# Altium PCB PCB10.PcbDoc
Units mm, origin at the board's own origin, x right, y up, seen from the top; angles counter-clockwise.
Board outline 100 x 100 mm, 12 copper layers (L1, L2, L3, L4, L5, L6, L7, L8, L9, L10, L11, L12), stack 71.138 mm thick; 2 components, 6 nets, 4 pads, 140 vias.
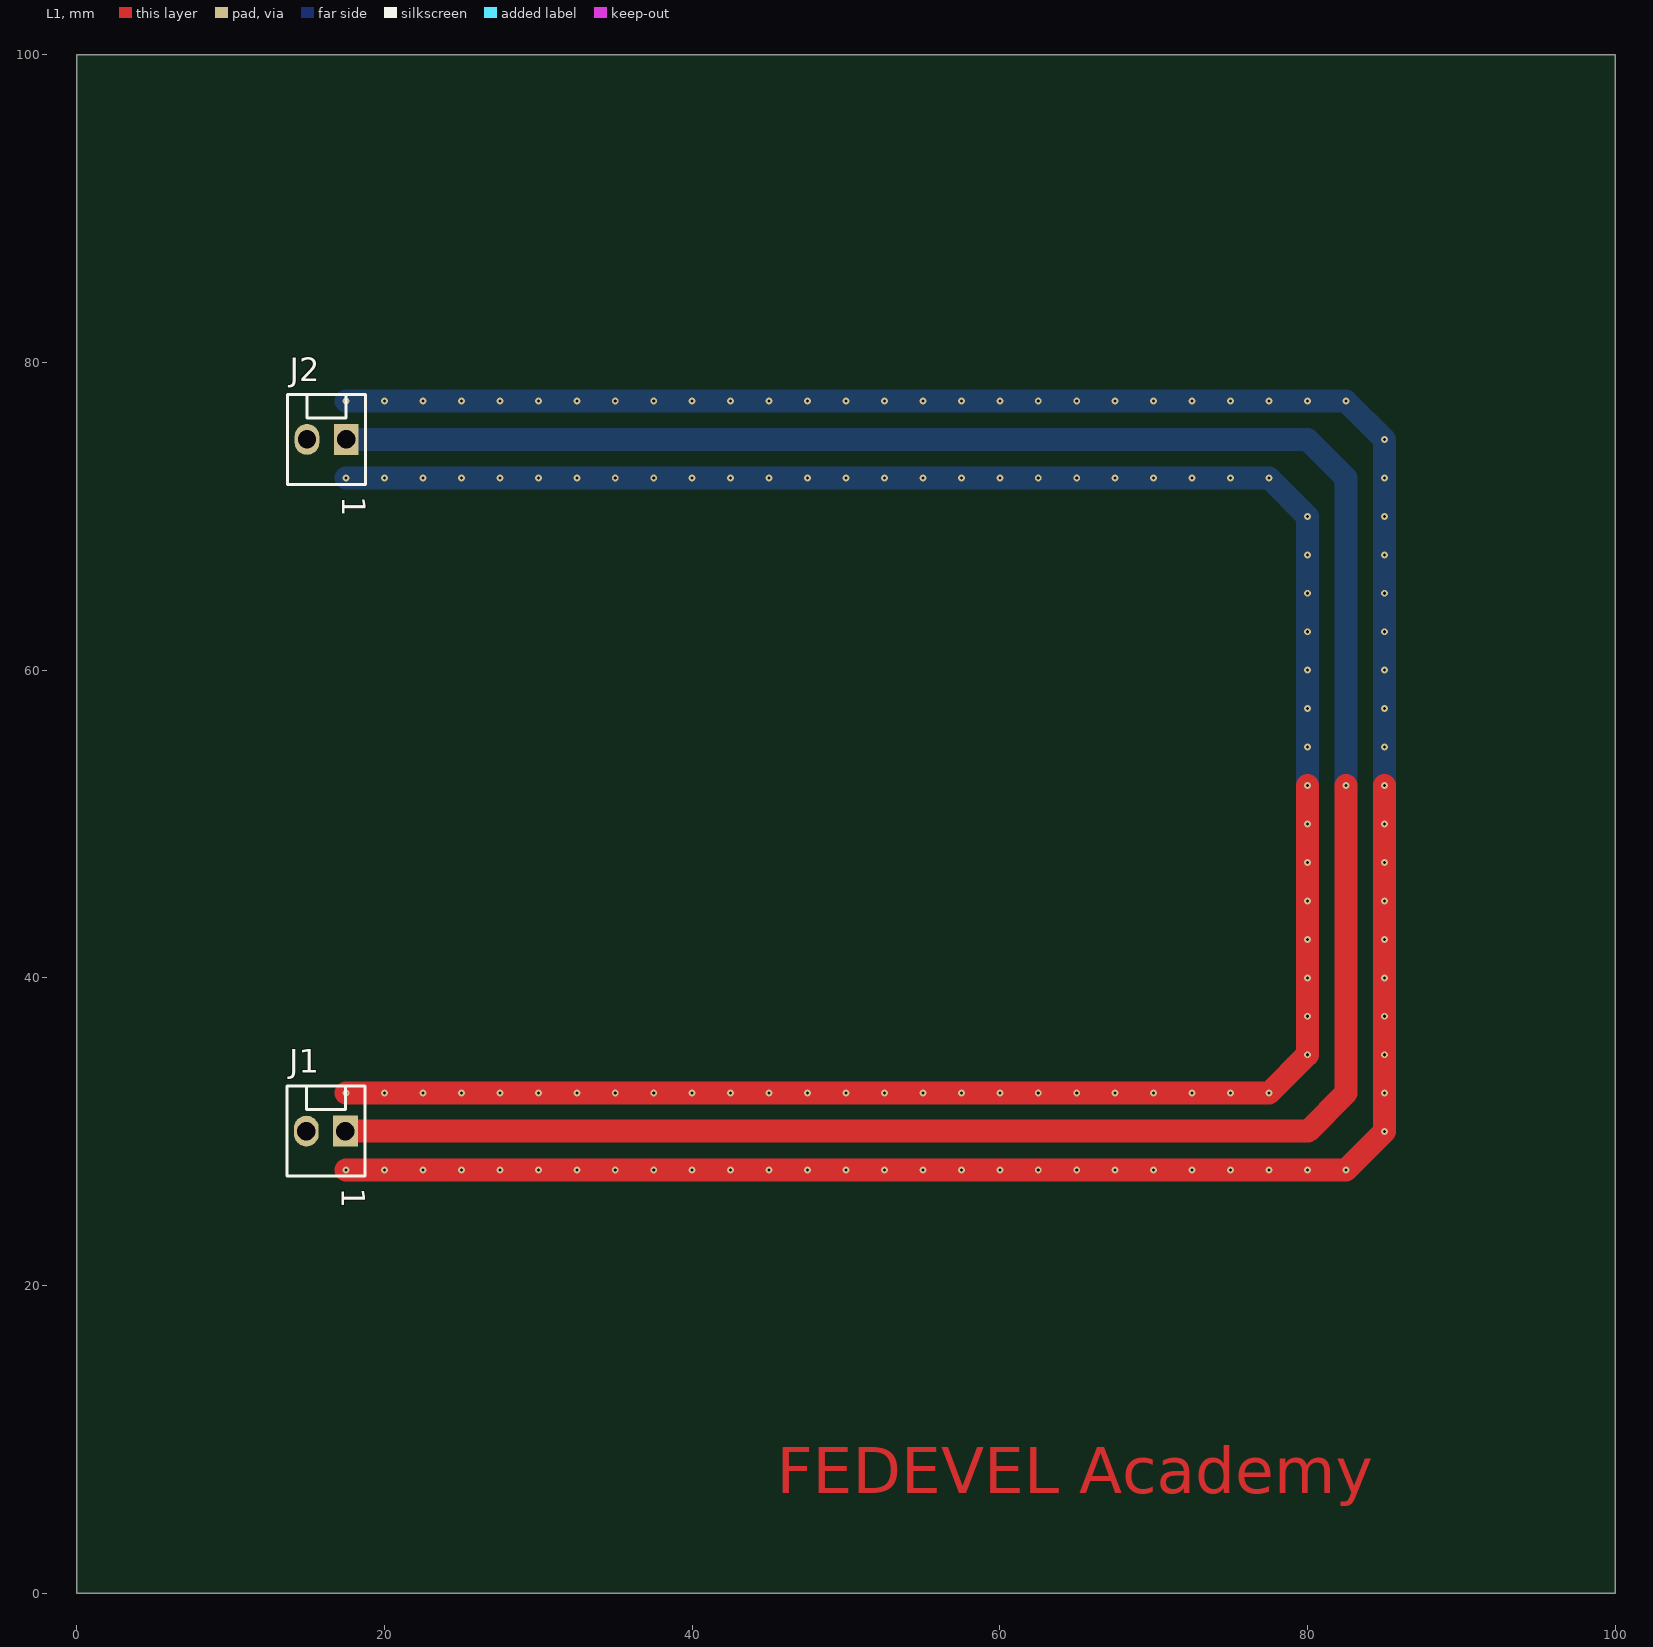
[diagram p0: L1 view]
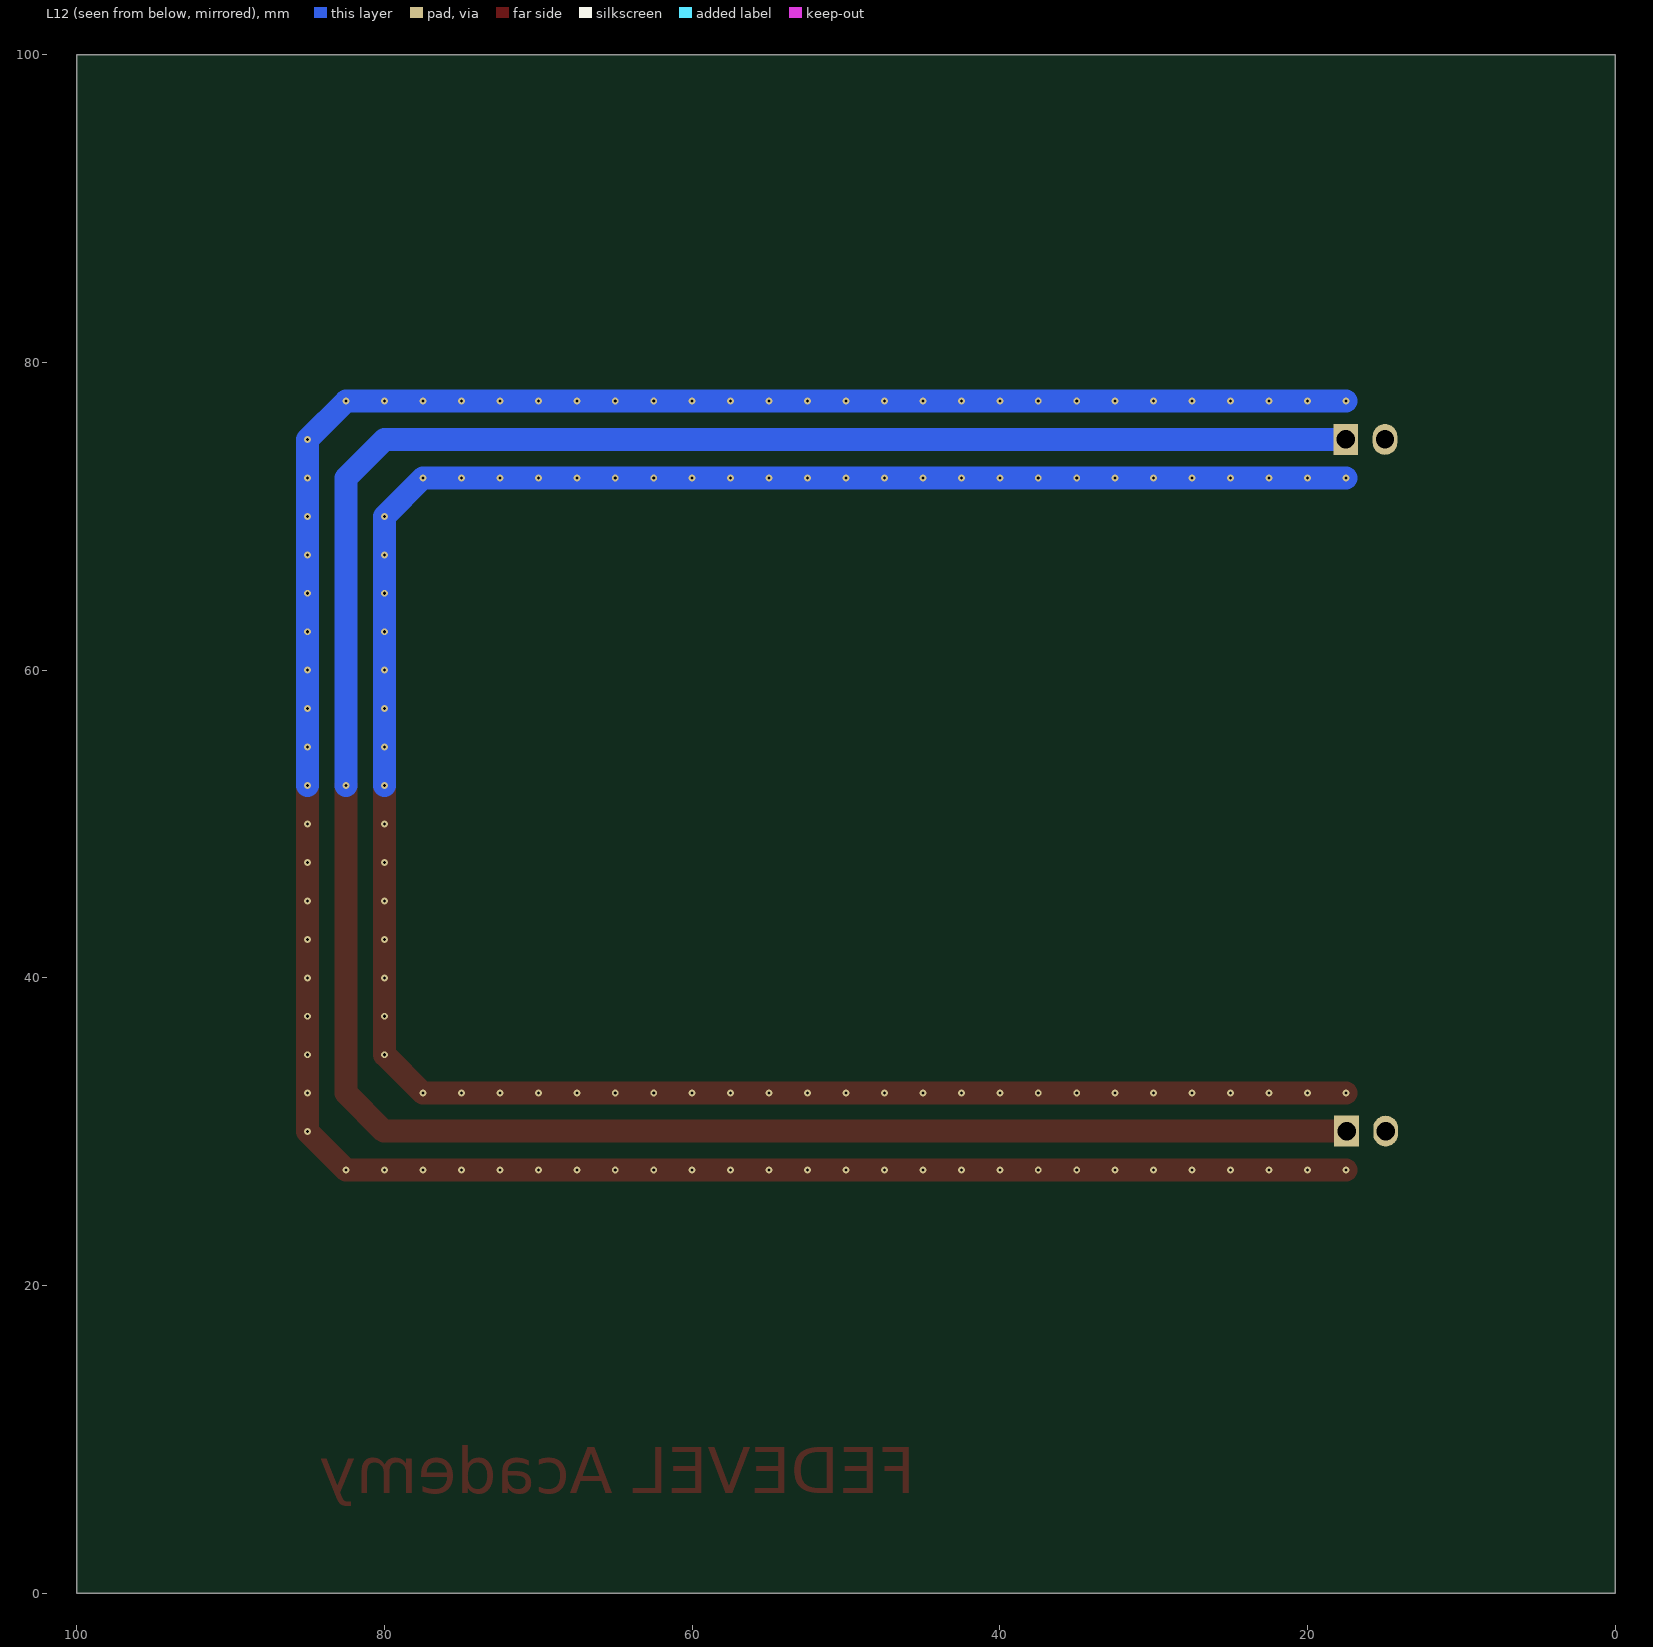
[diagram p1: L12 view, seen from below]
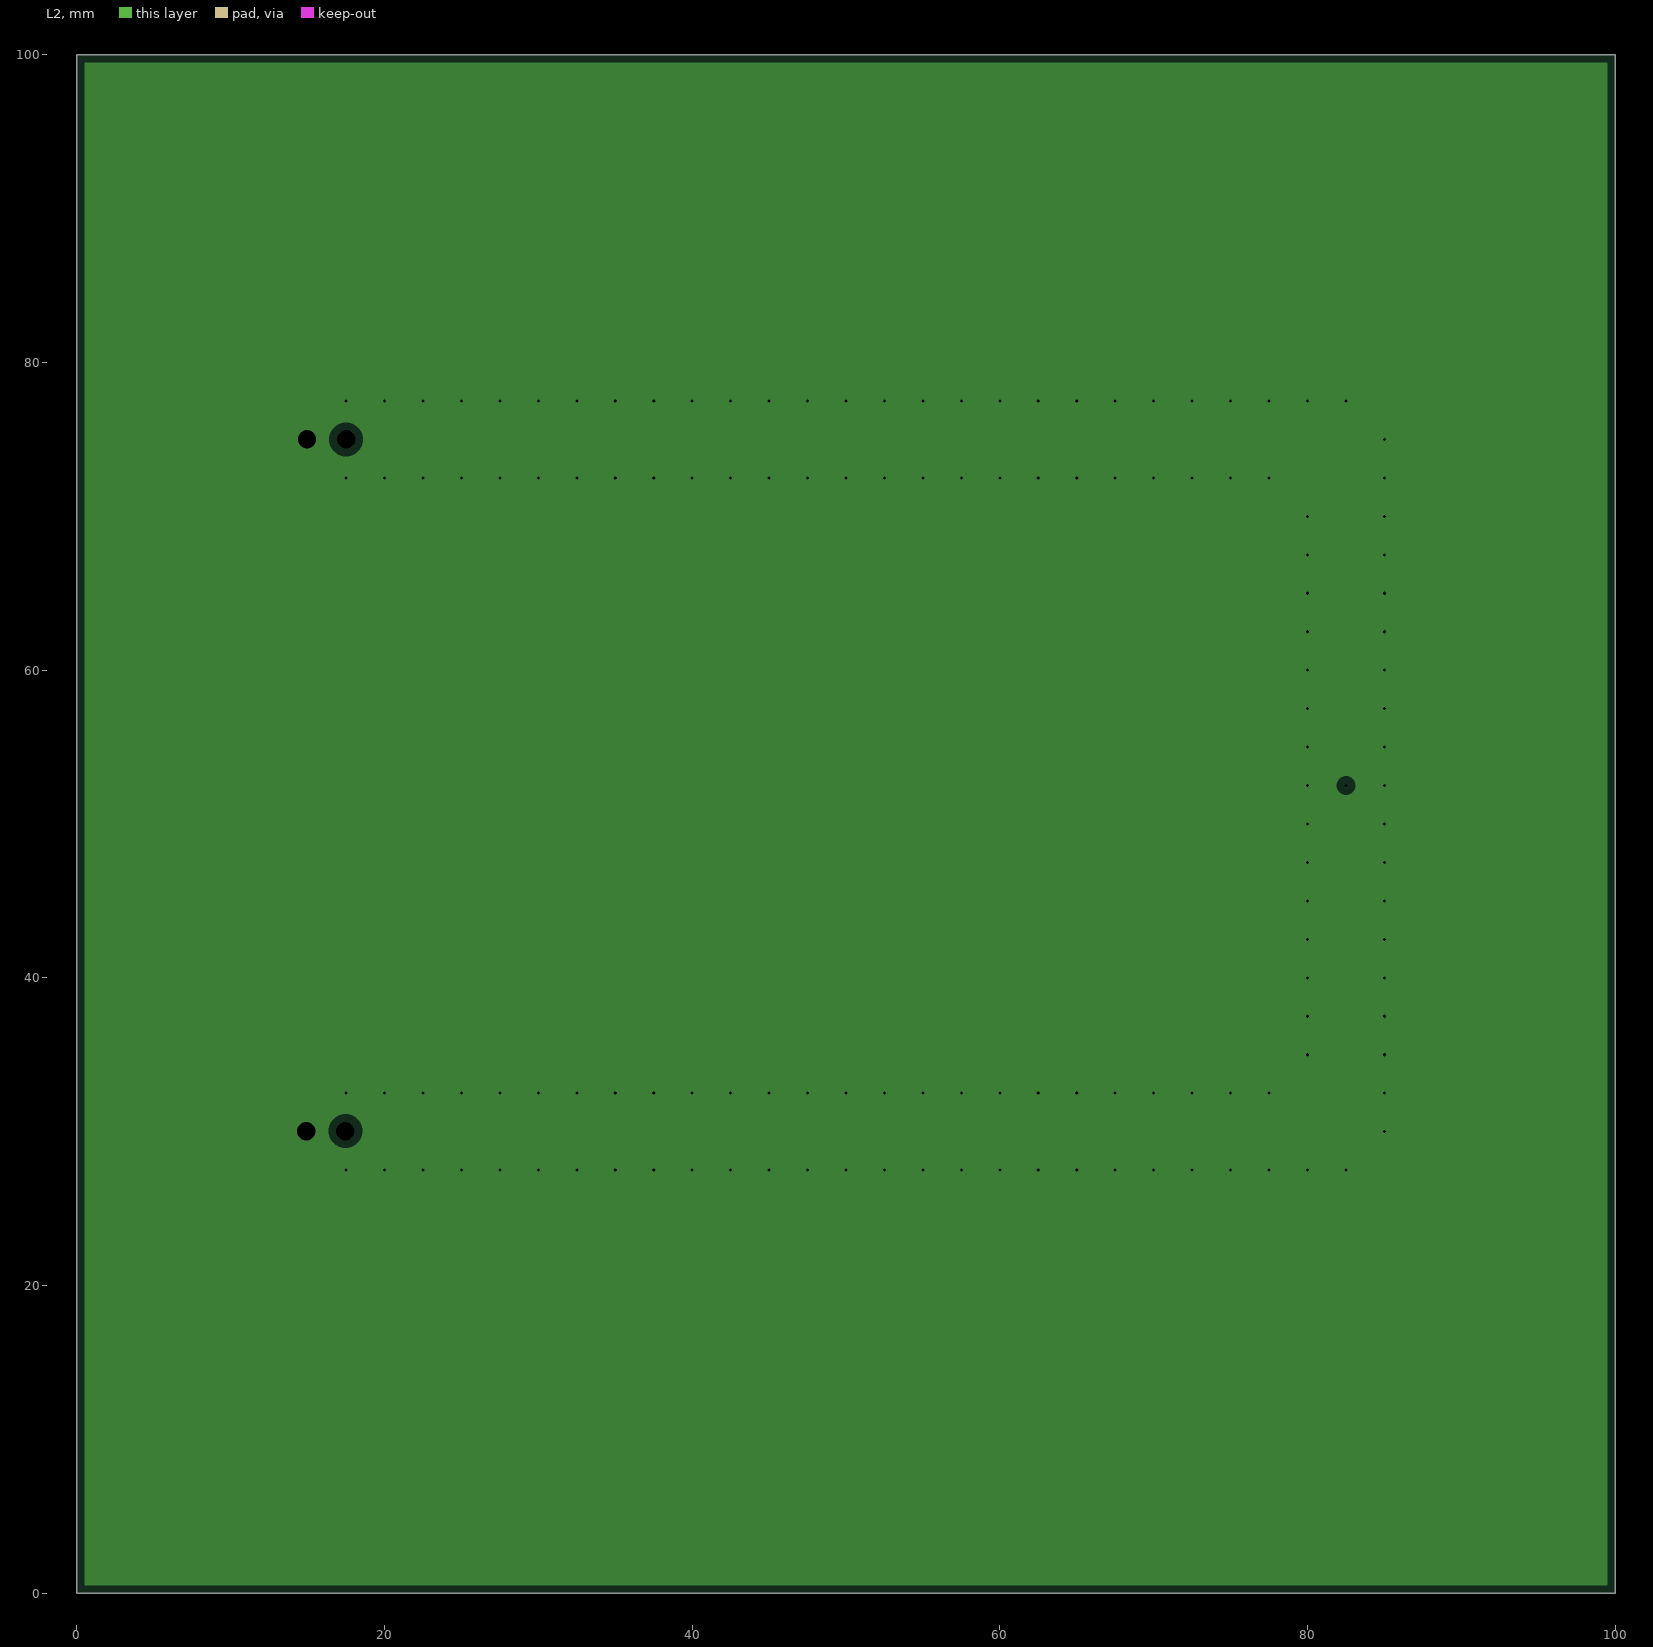
[diagram p2: L2, clearances drawn from the general rule]
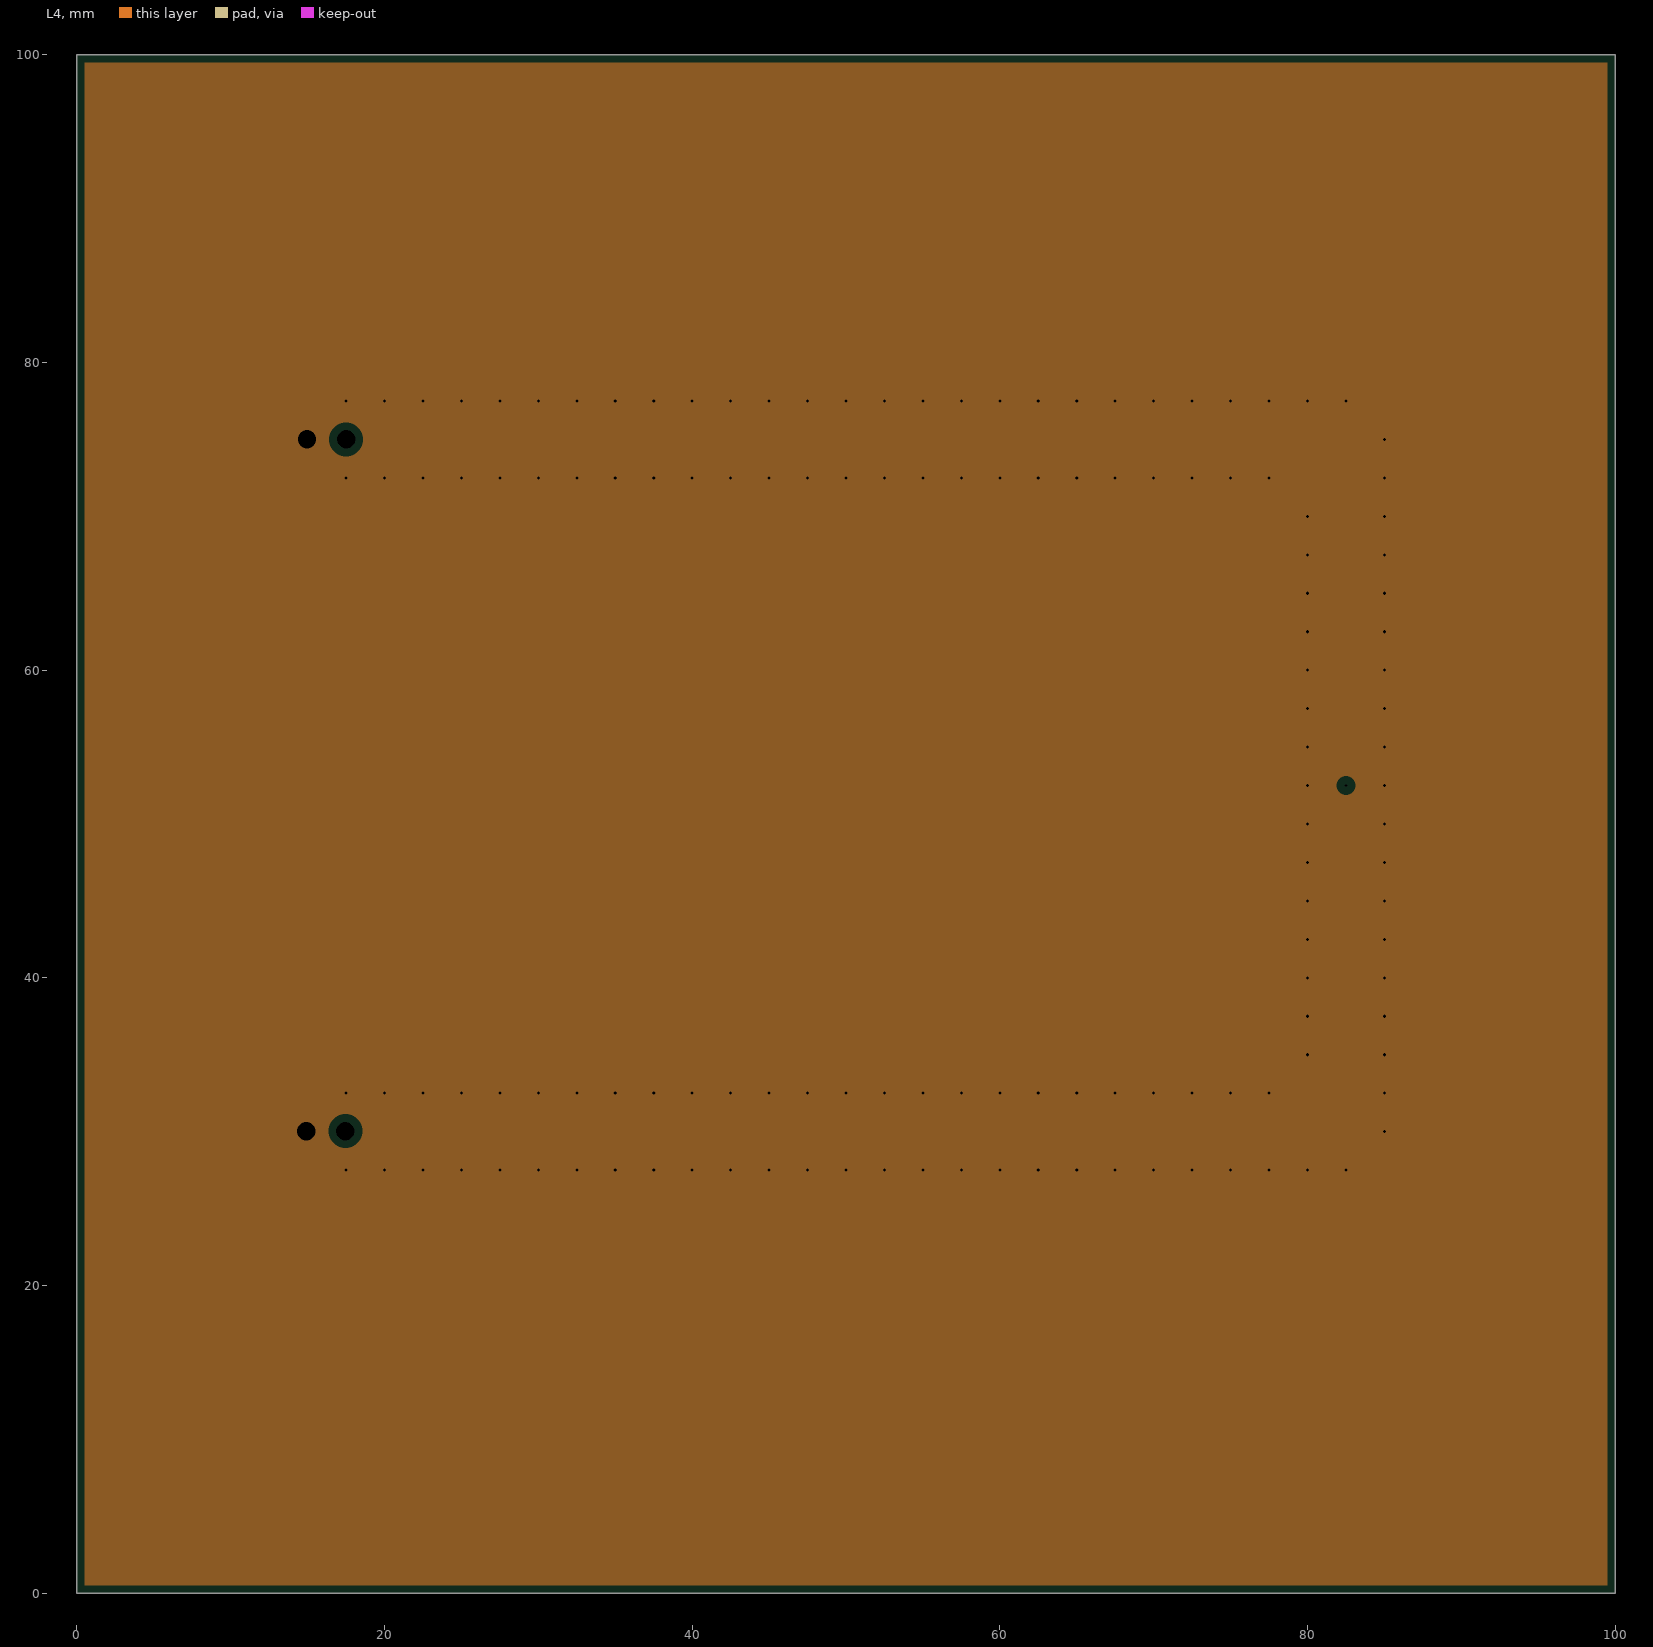
[diagram p3: L4, clearances drawn from the general rule]
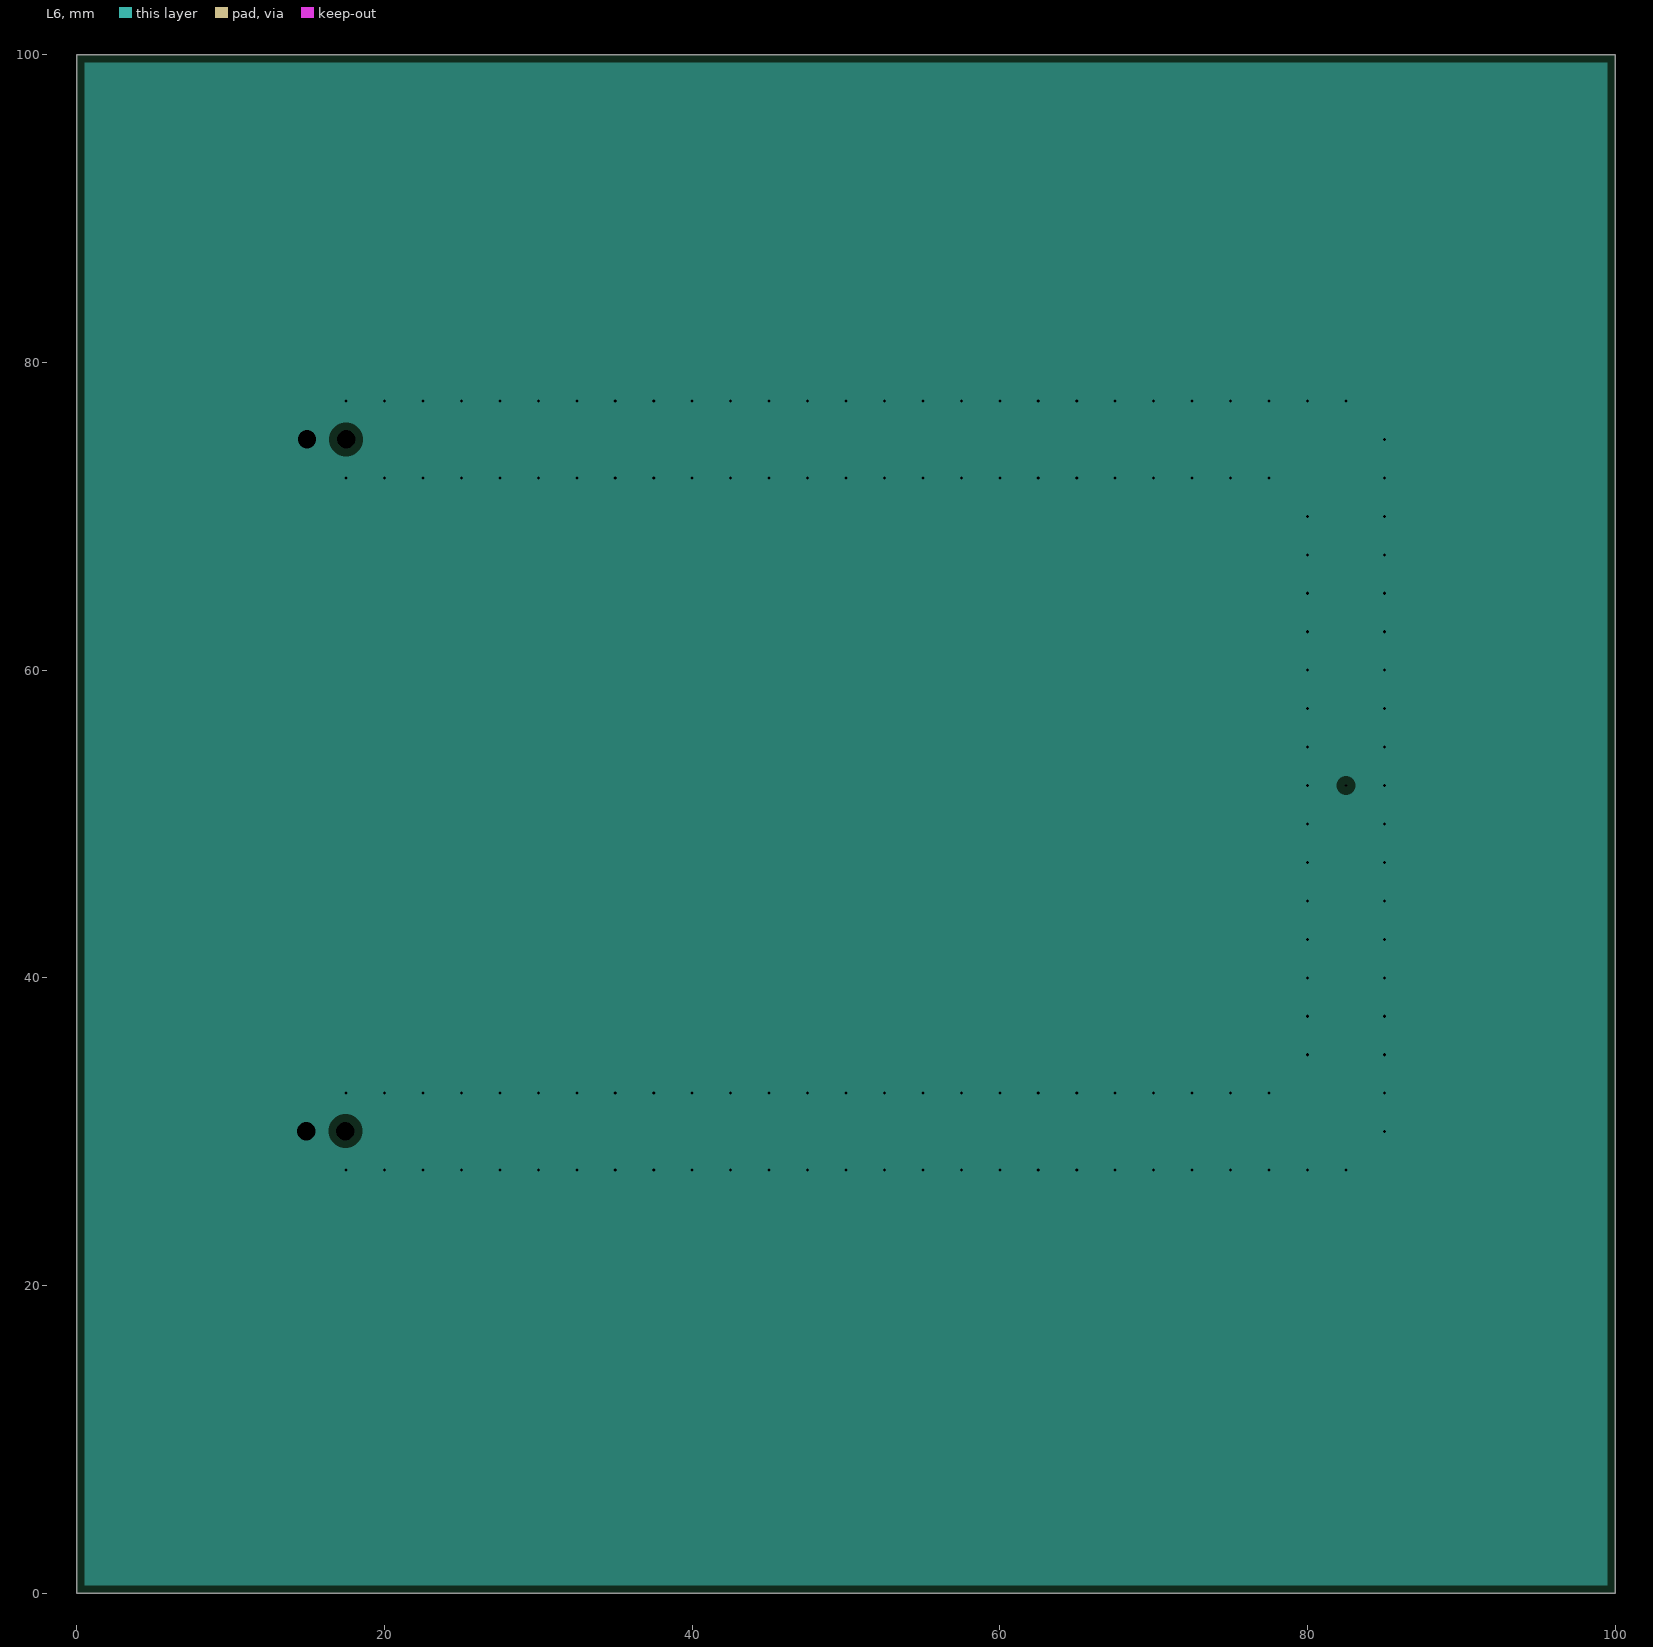
[diagram p4: L6, clearances drawn from the general rule]
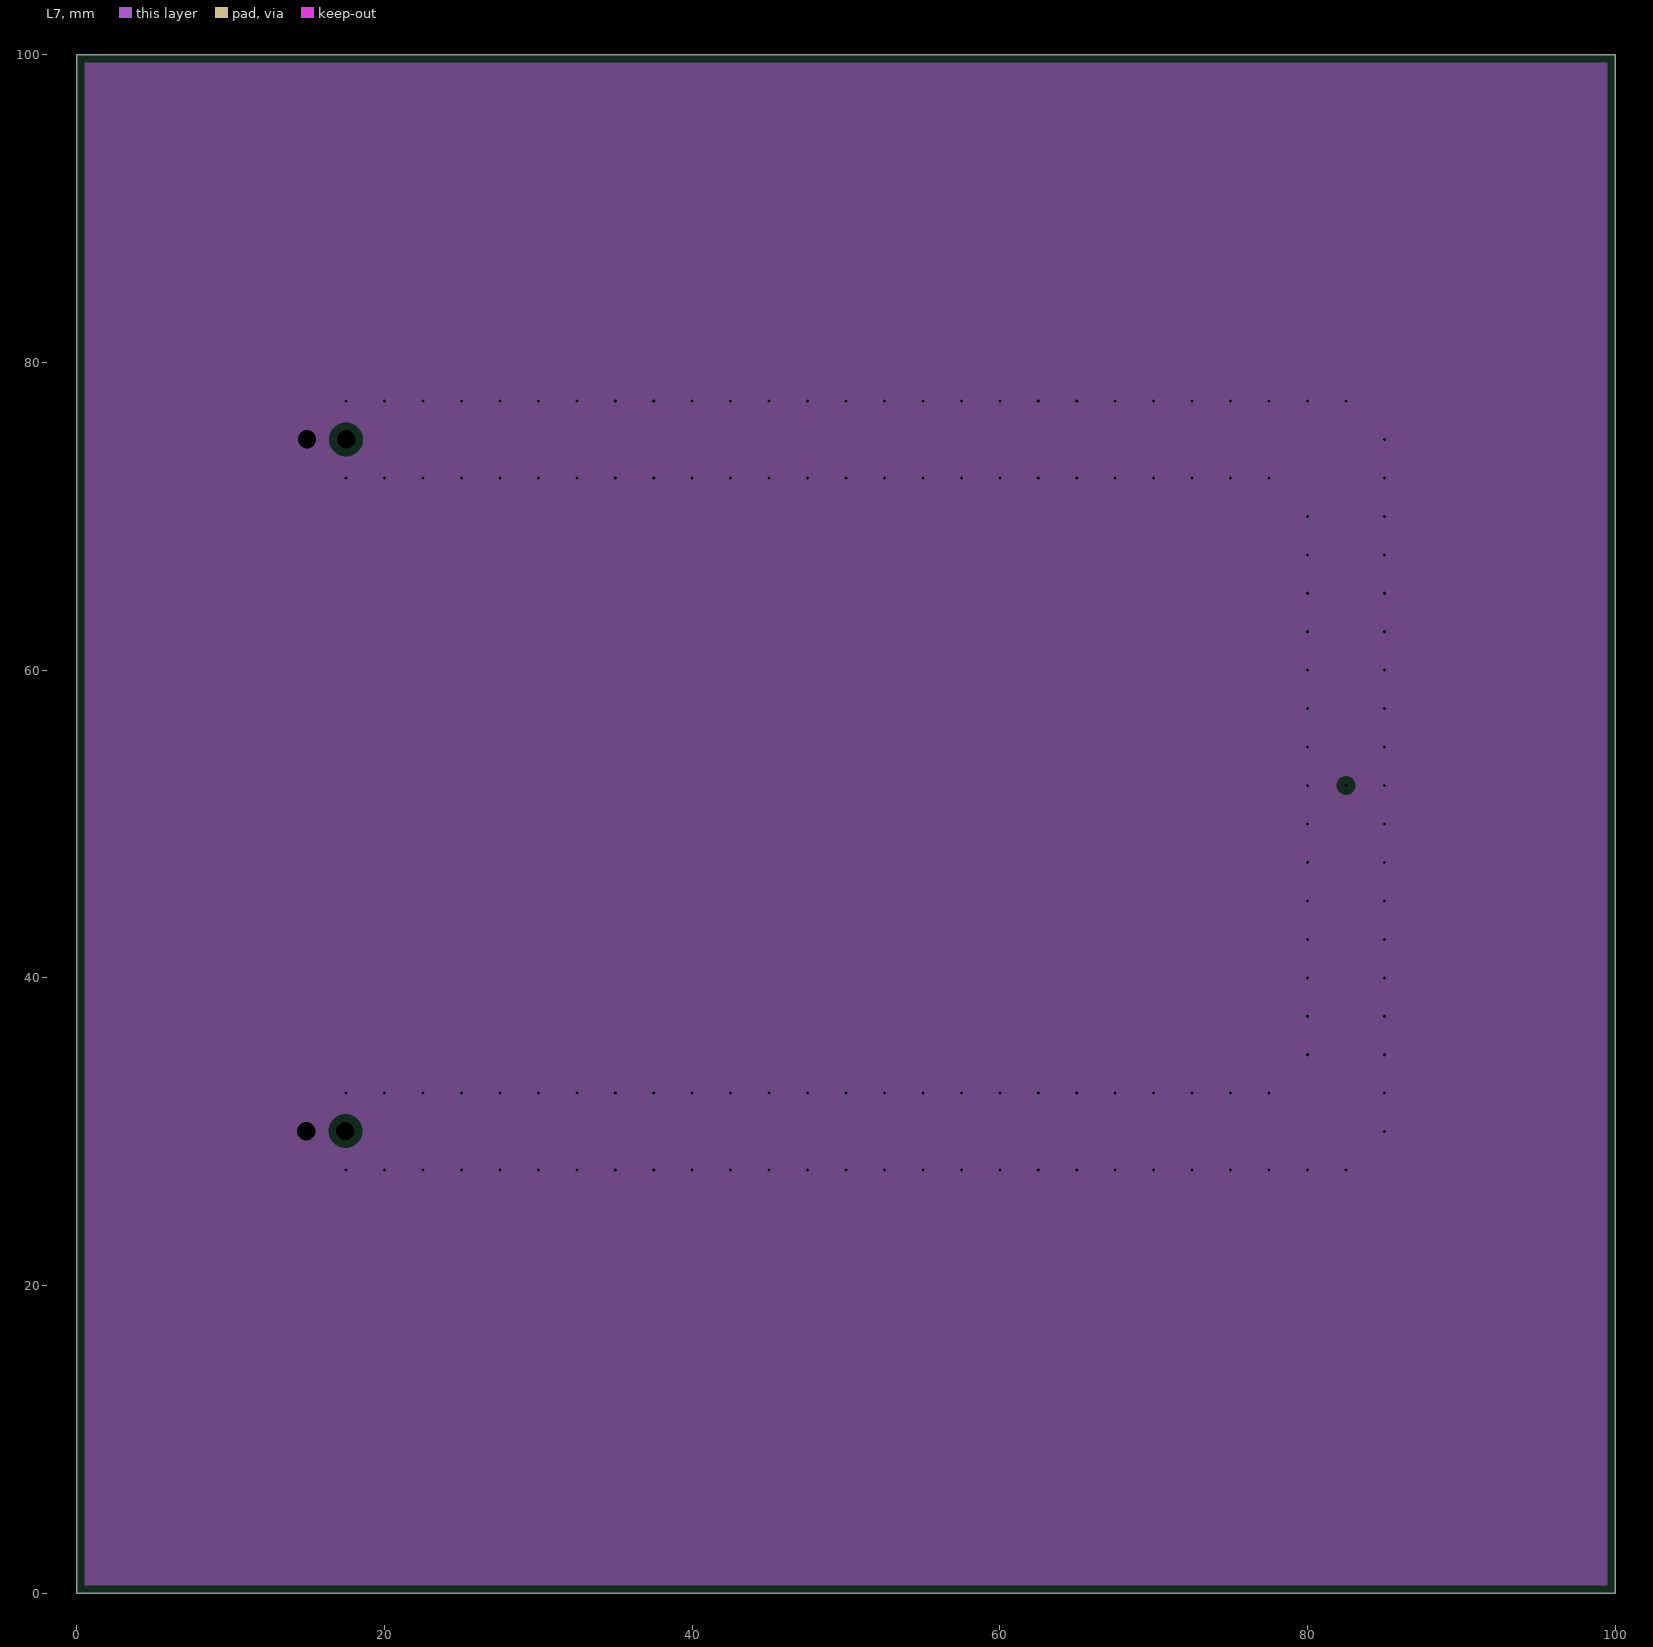
[diagram p5: L7, clearances drawn from the general rule]
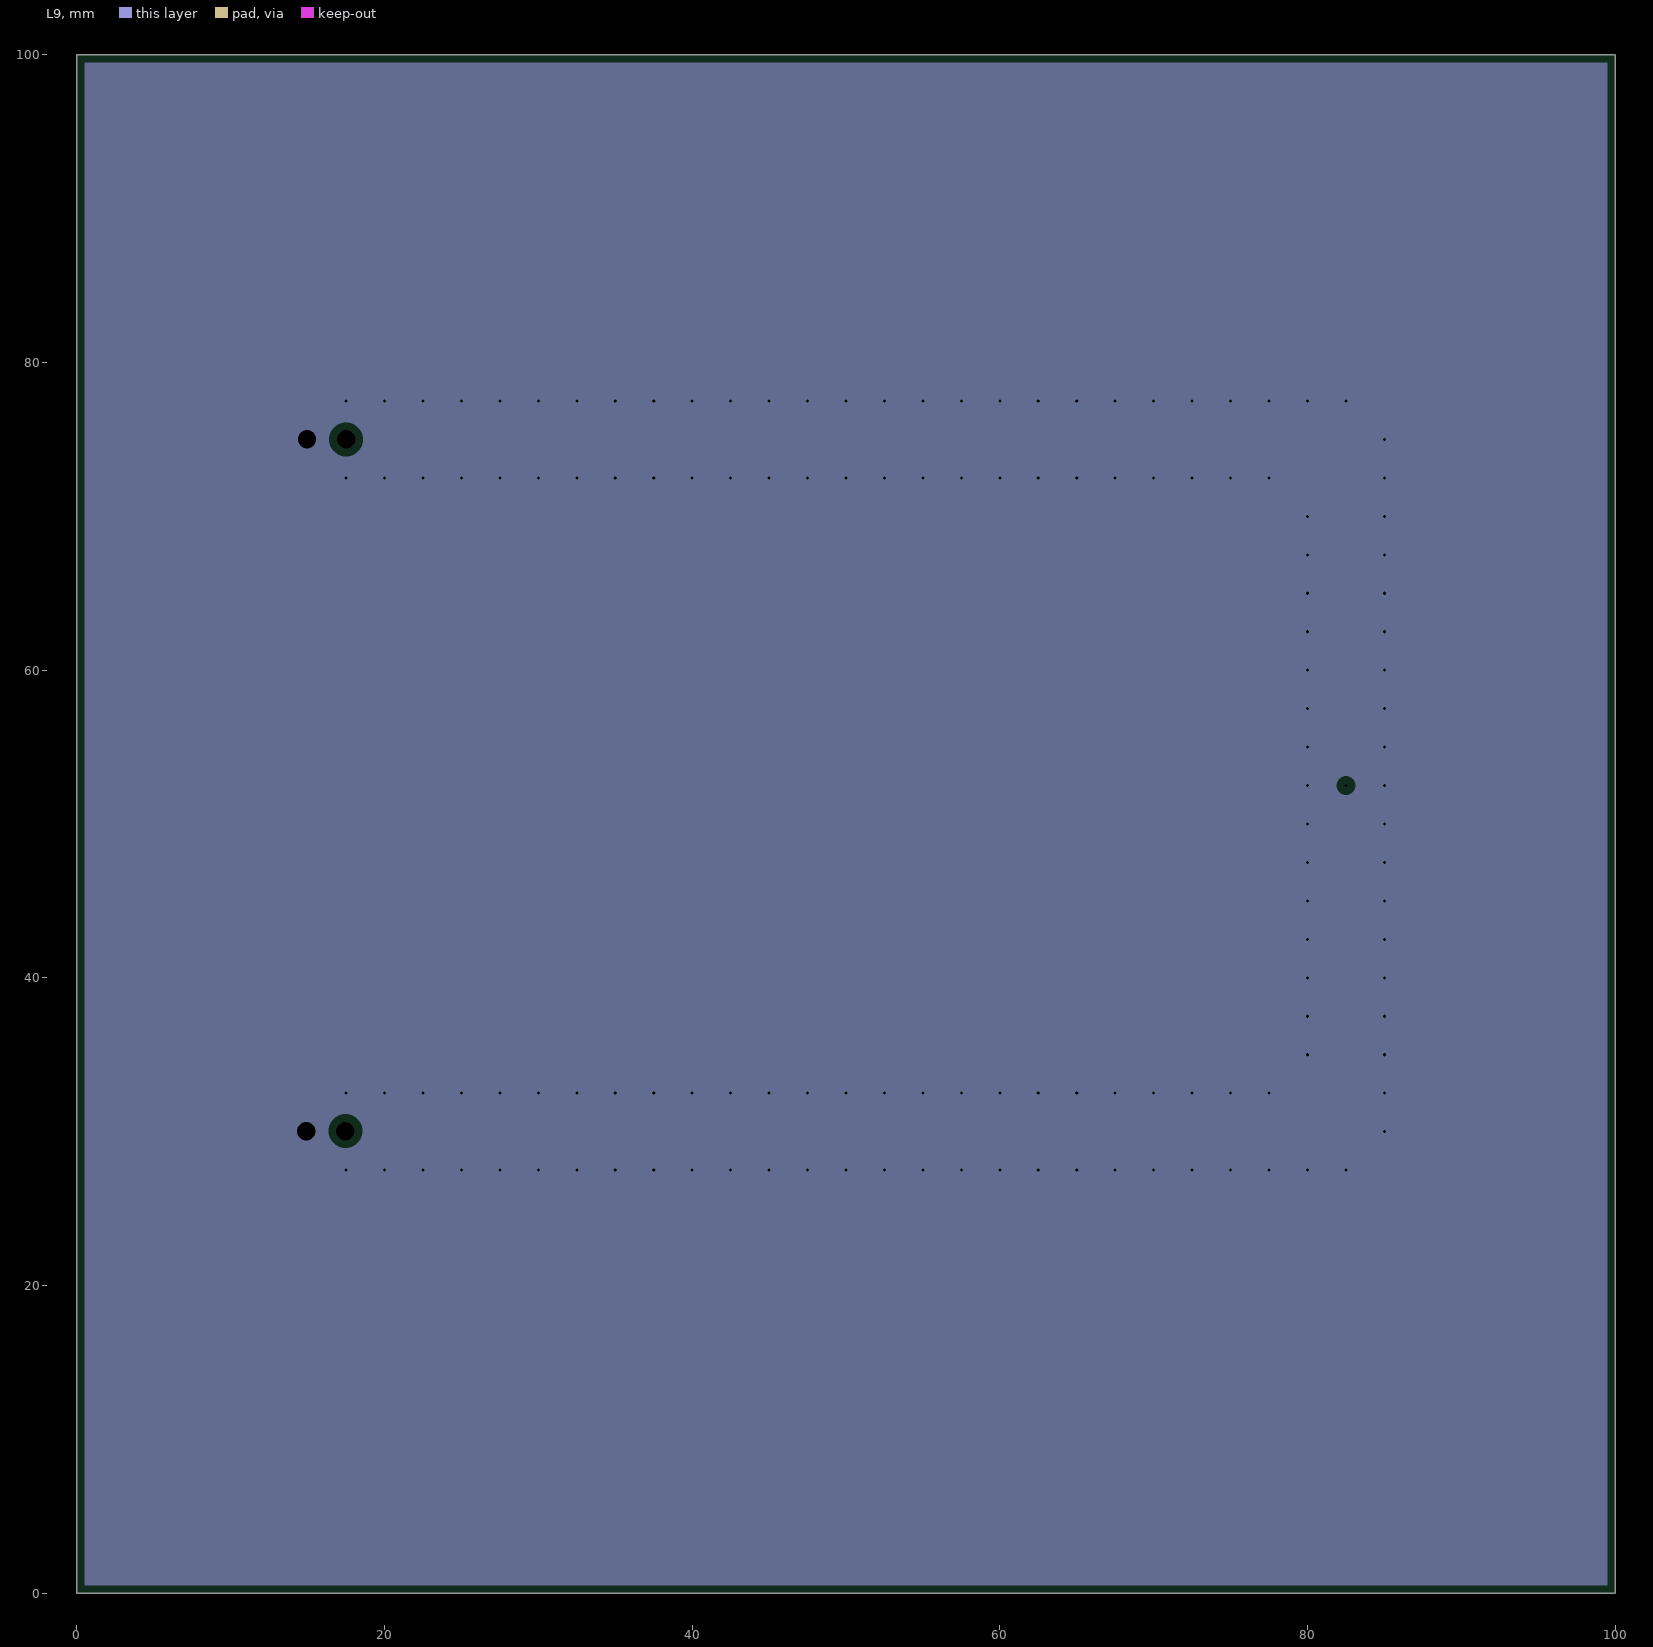
[diagram p6: L9, clearances drawn from the general rule]
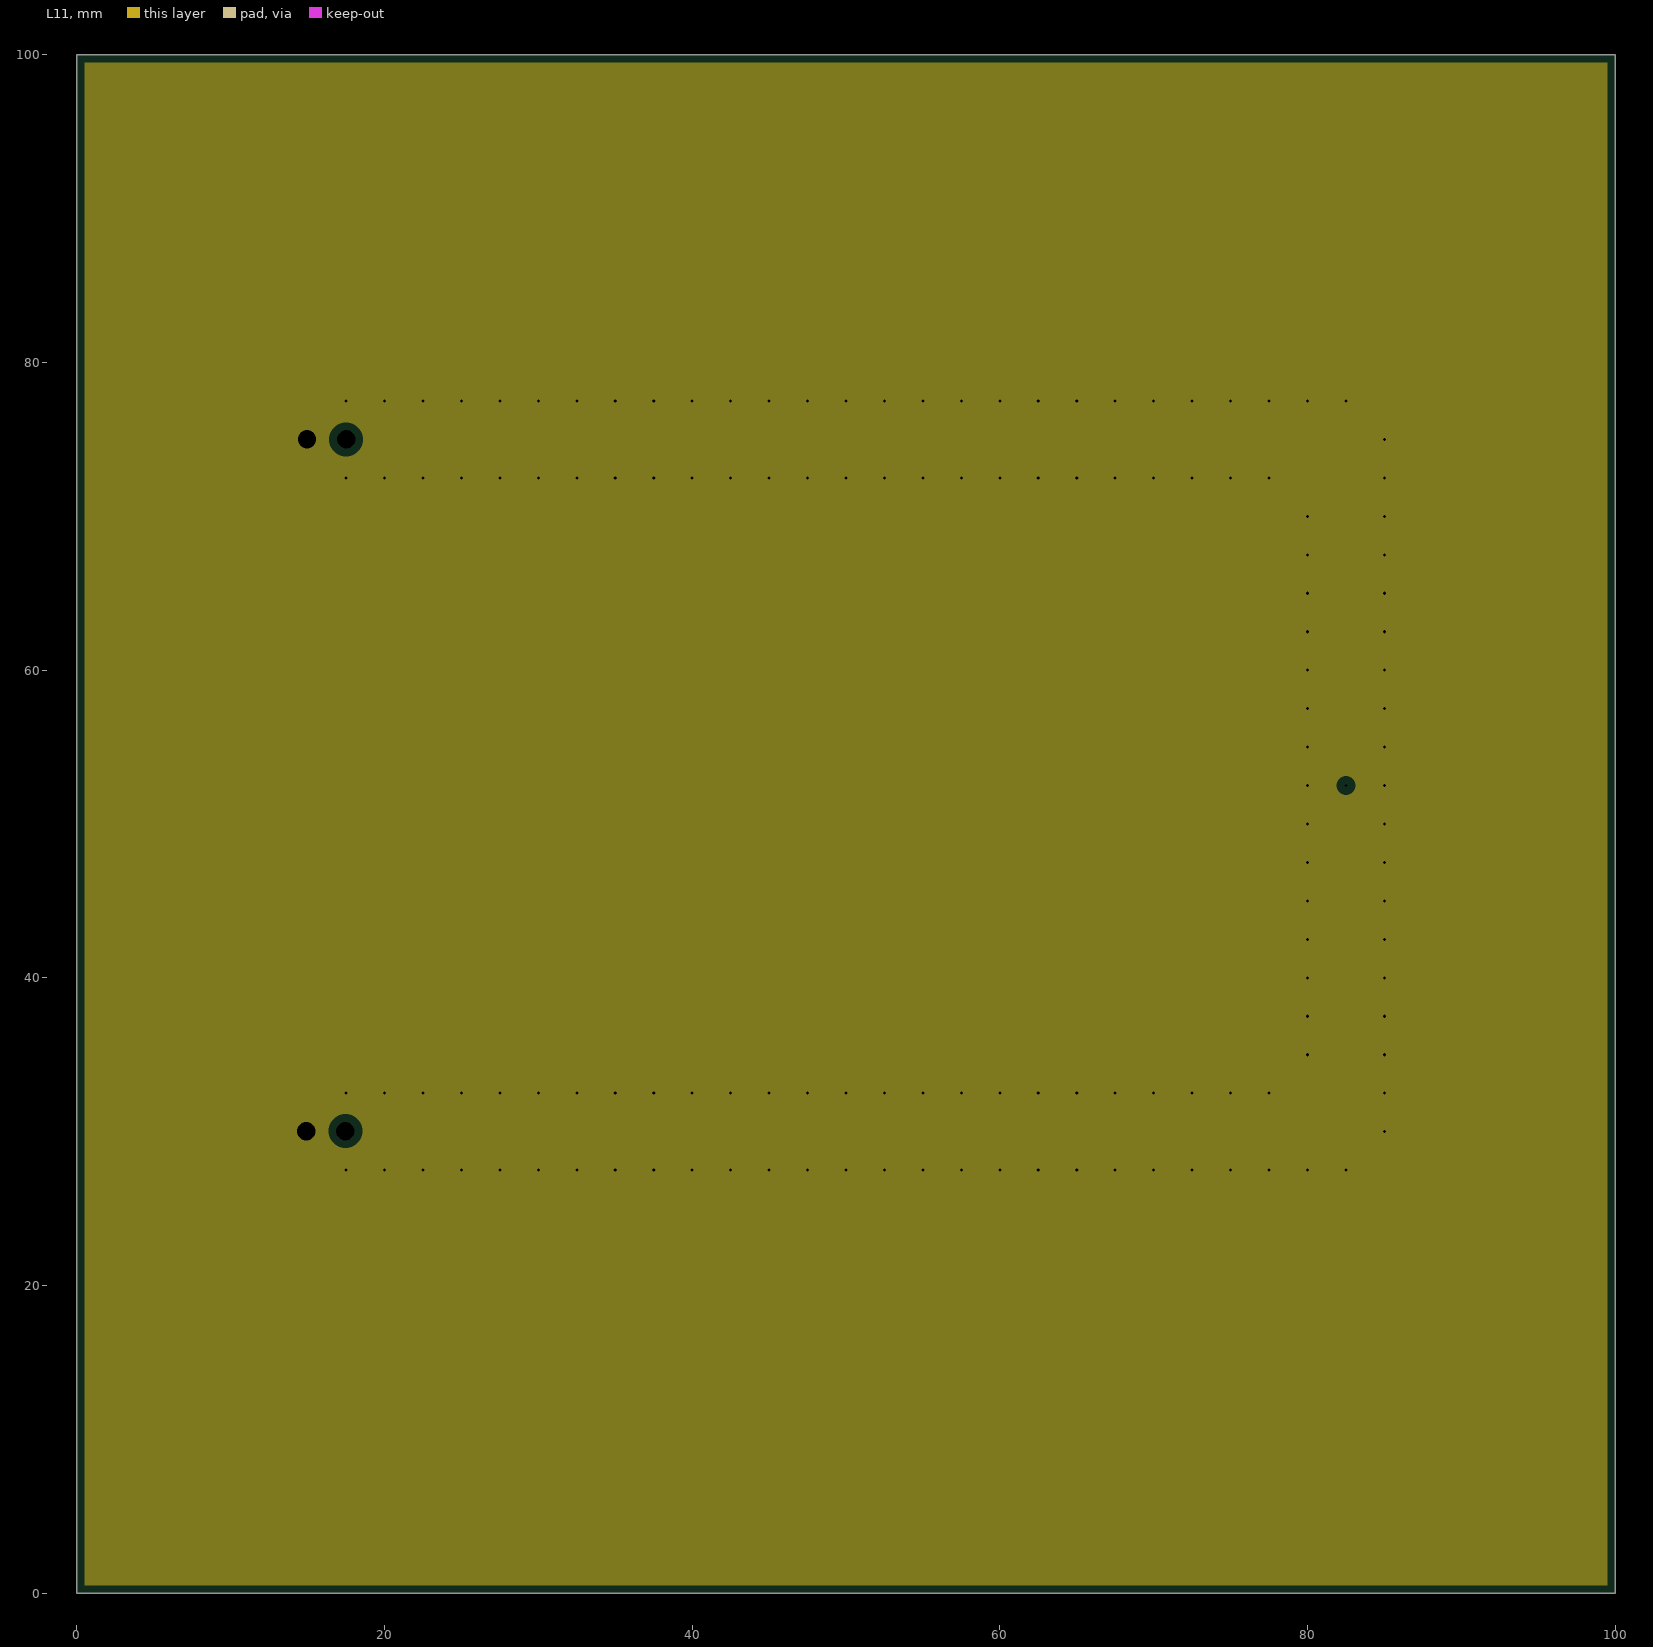
[diagram p7: L11, clearances drawn from the general rule]

## Layer stack, top to bottom
Top Solder: solder mask 0.0203, Solder Resist, Dk 4.1
L1: signal copper 0.035
Dielectric 1: prepreg 0.0668, FR-4, Dk 4
L2: plane copper 0.035, net GND
Dielectric 2: prepreg 0.0808, FR-4, Dk 3.7
L3: signal copper 0.035
Dielectric 3: prepreg 0.2195, FR-4, Dk 4.4
L4: plane copper 34.8, net GND
Dielectric 4: core 0.1016, FR-4, Dk 4.2
L5: signal copper 0.0175
Dielectric 5: prepreg 0.1052, FR-4, Dk 4.2
L6: plane copper 0.0348, net GND
Dielectric 6: core 0.0762, FR-4, Dk 4.2
L7: plane copper 0.0348, net GND
Dielectric 7: prepreg 0.1052, FR-4, Dk 4.2
L8: signal copper 0.0175
Dielectric 8: core 0.1016, FR-4, Dk 4.2
L9: plane copper 34.8, net GND
Dielectric 9: prepreg 0.2195, FR-4, Dk 4.4
L10: signal copper 0.035
Dielectric 10: prepreg 0.0808, FR-4, Dk 3.7
L11: plane copper 0.035, net GND
Dielectric 11: prepreg 0.0668, FR-4, Dk 4
L12: signal copper 0.035
Bottom Solder: solder mask 0.0203, Solder Resist, Dk 4.1

## Board outline
0,0 100,0 100,100 0,100

## Design rules (kind name [scope] priority, off if disabled: settings)
Clearance [All] p1: gap=0.1 ignorepadtopadclearanceinfootprint=FALSE
PlaneClearance [All] p1: clearance=0.508
PlaneConnect [All] p1: planeconnectstyle=Direct reliefexpansion=0.508 reliefentries=4 reliefconductorwidth=0.254 reliefairgap=0.254
PolygonConnect [All] p1: connectstyle=Direct reliefconductorwidth=0.254 reliefentries=4 polygonreliefangle="90 Angle" airgapwidth=0.254
RoutingVias [All] p1: holewidth=0.2 width=0.45 viastyle="Through Hole" minholewidth=0.2 minwidth=0.45 maxholewidth=0.2 maxwidth=0.45
SolderMaskExpansion [IsVia] p1: expansion=0.102 istentingtop=TRUE
Width S50 [InNet('SIG1') OR InNet('SIG2') OR InNet('SIG3')] p1 off: maxlimit=0.254 minlimit=0.062 preferedwidth=0.081 toplayer_minwidth=0.081 toplayer_prefwidth=0.102 midlayer2_minwidth=0.063 midlayer2_prefwidth=0.079 midlayer5_minwidth=0.063 midlayer5_prefwidth=0.079 bottomlayer_minwidth=0.081 bottomlayer_prefwidth=0.102 impedanceprofiledriven=TRUE impedanceprofileid={3137EA88-FD21-4FB8-86AF-931E089658EA} impedanceprofilevalue=50.000000 minimp=50.000000 maximp=50.000000 favimp=50.000000
Width [All] p2: maxlimit=50 minlimit=0.1 preferedwidth=0.3
28 further rules are at their usual default settings.

## Components (designator, comment, footprint, x,y, rotation, side; value= is the part's Value field where it differs from the comment)
J1 "1x2 Header" HDR1X2 17.46,30.04 r270 top
J2 "1x2 Header" HDR1X2 17.5,75 r270 top

## Footprints (in the part's own frame and the unit in brackets; to place one, negate y for a bottom-side part, rotate by r counter-clockwise, add the part's x,y. Pads: shape width x height; smd on the part's side, far side on the other; paste and mask are expansions set on the pad)
HDR1X2 [mm]
  rect 2x1.6 hole 1.2: 1(0,0)
  oval 2x1.6 hole 1.2: 2(0,-2.54)
  silkscreen extent -2.92,-3.81 2.92,1.27, body extent -2.9,-3.81 2.9,1.27, height 11.71

## Part data
J1 J2: library part 22-29-2021, "Headers & Wire Housings 2 PIN F/LK HEADER", Colour=White, Contact Resistance=10mR, Current Rating=4A, Flammability Rating="UL94 V-0", Manufacturer=Molex, Max Operating Temperature=75°C, Max Voltage Rating (AC)=250V, Min Operating Temperature=0°C, Package Quantity=2500, Supplier Part Number 1=WM2744-ND, Category=Connectors, ComponentLink1Description=https://datasheet.ciiva.com/30169/113840022292021-pcb-headers-30169888.pdf, ComponentLink1URL=https://datasheet.ciiva.com/30169/113840022292021-pcb-headers-30169888.pdf, ComponentLink2Description=https://datasheet.ciiva.com/19472/879588-19472951.pdf, ComponentLink2URL=https://datasheet.ciiva.com/19472/879588-19472951.pdf, ComponentLink3Description=https://datasheet.ciiva.com/11752/0900766b80d5fb7a-11752634.pdf, ComponentLink3URL=https://datasheet.ciiva.com/11752/0900766b80d5fb7a-11752634.pdf, ComponentLink4Description=https://datasheet.ciiva.com/5153/0022292021-pcb-headers-159390-5153053.pdf, ComponentLink4URL=https://datasheet.ciiva.com/5153/0022292021-pcb-headers-159390-5153053.pdf, ComponentLink5Description=https://datasheet.ciiva.com/9468/0022292021-pcb-headers-9468301.pdf, ComponentLink5URL=https://datasheet.ciiva.com/9468/0022292021-pcb-headers-9468301.pdf, ComponentLink6Description=https://datasheet.ciiva.com/25908/0022292021-pcb-headers-25908286.pdf, ComponentLink6URL=https://datasheet.ciiva.com/25908/0022292021-pcb-headers-25908286.pdf, Contact Material=Brass, Contact Plating=Gold, Depth=5.8mm, Gender=Male, Glow Wire Compliant=Non-compliant, Halogen Free="Low Halogen", Height=11.7mm, Housing Colour=White, Housing Material=Nylon, Lead Free="Lead Free", Length=12.7mm, Manufacturer Part Number=22-29-2021, Max Current Rating=4A, Mount="Through Hole", Number of Circuits=2, Number of Contacts=2, Number of Positions=2, Number of Rows=1, Orientation=Straight, Packaging=Bulk, Pitch=2.54mm, Pricing 1="1=0.46, 10=0.431, 100=0.3014, 500=0.2583, 1000=0.21525, 5000=0.1845, 10000=0.1722 (USD)", Radiation Hardening=No, REACH SVHC=Unknown, Stock 1=17589, Supplier 1=Digi-Key, Termination="Through Hole", Voltage Rating=250V, Voltage Rating (DC)=250V

## Via types
v1: diameter 0.45, hole 0.2, L1 to L12, tented both sides, 140 vias

## Nets (pads, with @x,y where several pads share a name; then routed paths per layer and width w, separated by ;. In a path a pad name is that pad's centre, name@x,y a point inside that pad or via, vN(x,y) a via of type N, cw(c..) or ccw(c..) an arc to the next point about the centre after c; other vN are vias at no path point)
GND: J1.2 J2.2 | length 344.1
  L1 w1.5: v1(17.5,27.5) v1(82.5,27.5) v1(85,30) v1(85,32.5) v1(85,35) v1(85,37.5) v1(85,40) v1(85,42.5) v1(85,45) v1(85,47.5) v1(85,50) v1(85,52.5) ; v1(17.5,32.5) v1(77.5,32.5) v1(80,35) v1(80,37.5) v1(80,40) v1(80,42.5) v1(80,45) v1(80,47.5) v1(80,50) v1(80,52.5)
  L12 w1.5: v1(17.5,72.5) v1(77.5,72.5) v1(80,70) v1(80,52.5) ; v1(17.5,77.5) v1(82.5,77.5) v1(85,75) v1(85,52.5)
  other v1: 20,27.5 22.5,27.5 25,27.5 27.5,27.5 30,27.5 32.5,27.5 35,27.5 37.5,27.5 40,27.5 42.5,27.5 45,27.5 47.5,27.5 50,27.5 52.5,27.5 55,27.5 57.5,27.5 60,27.5 62.5,27.5 65,27.5 67.5,27.5 70,27.5 72.5,27.5 75,27.5 77.5,27.5 80,27.5 20,32.5 22.5,32.5 25,32.5 27.5,32.5 30,32.5 32.5,32.5 35,32.5 37.5,32.5 40,32.5 42.5,32.5 45,32.5 47.5,32.5 50,32.5 52.5,32.5 55,32.5 57.5,32.5 60,32.5 62.5,32.5 65,32.5 67.5,32.5 70,32.5 72.5,32.5 75,32.5 80,52.5 80,55 85,55 80,57.5 85,57.5 80,60 85,60 80,62.5 85,62.5 80,65 85,65 80,67.5 85,67.5 85,70 20,72.5 22.5,72.5 25,72.5 27.5,72.5 30,72.5 32.5,72.5 35,72.5 37.5,72.5 40,72.5 42.5,72.5 45,72.5 47.5,72.5 50,72.5 52.5,72.5 55,72.5 57.5,72.5 60,72.5 62.5,72.5 65,72.5 67.5,72.5 70,72.5 72.5,72.5 75,72.5 85,72.5 20,77.5 22.5,77.5 25,77.5 27.5,77.5 30,77.5 32.5,77.5 35,77.5 37.5,77.5 40,77.5 42.5,77.5 45,77.5 47.5,77.5 50,77.5 52.5,77.5 55,77.5 57.5,77.5 60,77.5 62.5,77.5 65,77.5 67.5,77.5 70,77.5 72.5,77.5 75,77.5 77.5,77.5 80,77.5
SIG1: J1.1 J2.1 | length 172.2
  L1 w1.5: J1.1@17.5,30 J1.1 80.04,30.04 82.5,32.5 v1(82.5,52.5)
  L12 w1.5: J2.1 80,75 82.5,72.5 v1(82.5,52.5)
SIG2: 
SIG3: 
SIG4: 
SIG5: 

## Polygon pours and split planes (outlines as drawn)
GND on L2 (split plane): 99.49,0.51 0.51,0.51 0.51,99.49 99.49,99.49
GND on L4 (split plane): 99.49,0.51 0.51,0.51 0.51,99.49 99.49,99.49
GND on L6 (split plane): 99.49,0.51 0.51,0.51 0.51,99.49 99.49,99.49
GND on L7 (split plane): 99.49,0.51 0.51,0.51 0.51,99.49 99.49,99.49
GND on L9 (split plane): 99.49,0.51 0.51,0.51 0.51,99.49 99.49,99.49
GND on L11 (split plane): 99.49,0.51 0.51,0.51 0.51,99.49 99.49,99.49

## Other copper
L1:
  text "FEDEVEL Academy" at 45.507,6.5 h3

## Silkscreen, mask and mechanical layers (free items; w line width, h text height)
Top Solder:
  rectangle: 42.5,2.5 92.5,12.5
Board:
  the board outline again, w0.2

## Text inside footprints (layer, text, board x,y; h text height)
J1: Top Overlay "1" at 17.206,26.357 h1.52 r270
J2: Top Overlay "1" at 17.246,71.317 h1.52 r270